# Altium PCB PCB_PCB_DCDC_BanTay_2025-10-21.pcbdoc
Units mm, origin at the board's own origin, x right, y up, seen from the top; angles counter-clockwise.
Board outline 85.05 x 64.78 mm, 2 copper layers (Top Layer, Bottom Layer); 39 components, 26 nets, 114 pads, 191 vias.
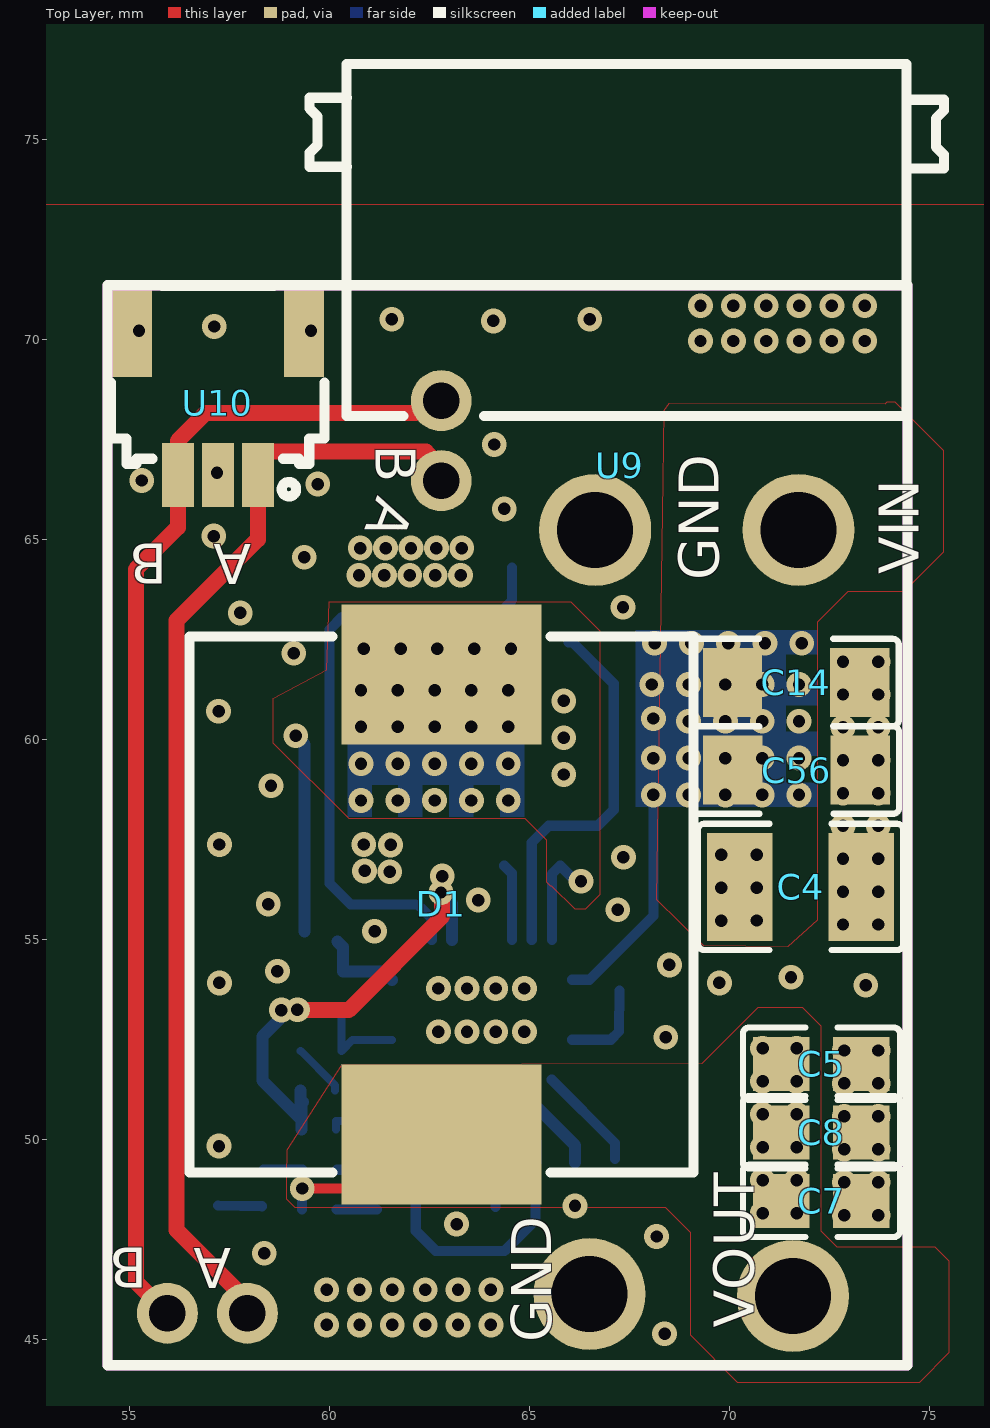
[diagram p0: Top Layer view]
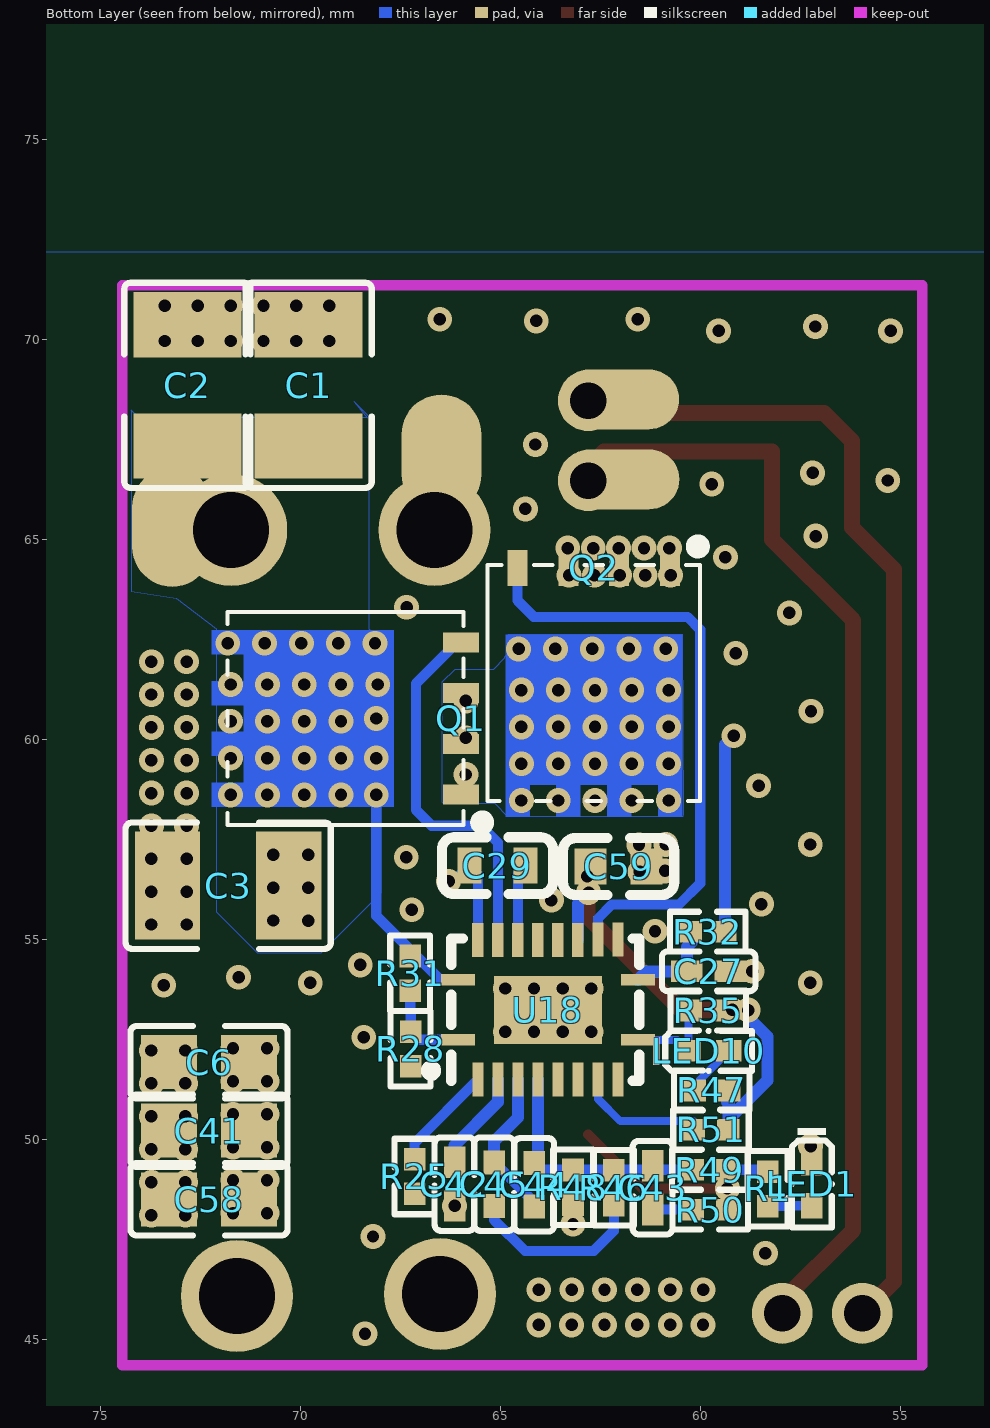
[diagram p1: Bottom Layer view, seen from below]

## Layer stack, top to bottom
Top Layer: signal copper (thickness not stored)
Dielectric: dielectric 0.32, FR-4, Dk 4.8
Bottom Layer: signal copper (thickness not stored)

## Board outline
110.45,25.4 25.4,25.4 25.4,90.18 110.45,90.18

## Components (designator, comment, footprint, x,y, rotation, side; value= is the part's Value field where it differs from the comment)
C1 "100uF" C1210#1 69.8,68.86 r90 bottom
C2 "100uF" C1210#1 72.83,68.86 r90 bottom
C3 "100uF" C1210#1 71.81,56.35 r0 bottom
C4 "100uF" C1210#2 71.79,56.32 r180 top
C5 "22uF" C0805#1 72.31,51.898 r0 top
C6 "22uF" C0805#2 72.29,51.938 r180 bottom
C7 "22uF" C0805#1 72.31,48.47 r0 top
C8 "22uF" C0805#1 72.31,50.184 r0 top
C14 "4.7uF" C1206 71.68,61.43 r180 top
C27 "12pF" C0402#1 59.8,54.21 r0 bottom
C29 "100nF" C0603#1 65.08,56.85 r180 bottom
C41 "22uF" C0805#2 72.29,50.224 r180 bottom
C42 "1uF" C0402#1 66.15,48.89 r270 bottom
C43 "470pF" C0402#1 61.2,48.8 r90 bottom
C44 "330pF" C0402#2 64.16,48.87 r270 bottom
C45 "3.9nF" C0402#2 65.16,48.89 r270 bottom
C56 "4.7uF" C1206 71.69,59.24 r180 top
C58 "22uF" C0805#2 72.29,48.51 r180 bottom
C59 "2.2uF" C0603#2 62.05,56.83 r180 bottom
D1 "4.7uH" IND-SMD_L12.6-W12.5-SRP1265A-220M 62.81,55.88 r270 top
LED1 "SZYY0402B" LED0402-RD_BLUE 57.22,48.89 r90 bottom
LED10 "TZ-P2-0402RTIA1-0.45T" LED0402-RD_RED 59.8,52.22 r0 bottom
Q1 "BSC070N10NS5(ES)" TDSON-8_L5.9-W5.2-P1.27-BL-1 67.77,60.53 r270 bottom
Q2 "BSC070N10NS5(ES)" TDSON-8_L5.9-W5.2-P1.27-BL-1 62.67,62.52 r180 bottom
R1 "12.4kΩ" R0402 58.32,48.77 r270 bottom
R25 "33kΩ" R0402 67.15,49.08 r270 bottom
R28 "12.4kΩ" R0402 67.25,52.27 r270 bottom
R31 "49.9kΩ" R0402 67.26,54.16 r270 bottom
R32 "392Ω" R0402 59.82,55.2 r0 bottom
R35 "20kΩ" R0402 59.81,53.23 r0 bottom
R46 "3.57kΩ" R0402 62.17,48.8 r90 bottom
R47 "2.2kΩ" R0402 59.72,51.23 r180 bottom
R48 "3.09kΩ" R0402 63.19,48.81 r270 bottom
R49 "24kΩ" R0402 59.77,49.25 r0 bottom
R50 "47.5Ω" R0402 59.76,48.25 r0 bottom
R51 "1kΩ" R0402 59.741,50.25 r180 bottom
U9 "XT30(2+2)PW-M.G.B" CONN-TH_4P-XT30PW-M 67.27,66.86 r180 top
U10 "HX 1.0-3P WTDK" CONN-SMD_3P-P1.00_HANXIA_HX-1.0-3P-WTDK 57.22,68.42 r180 top
U18 "LM5146RGYR" VQFN-20_L4.5-W3.5-P0.50-BL-EP 63.82,53.25 r0 bottom

## Footprints (in the part's own frame and the unit in brackets; to place one, negate y for a bottom-side part, rotate by r counter-clockwise, add the part's x,y. Pads: shape width x height; smd on the part's side, far side on the other; paste and mask are expansions set on the pad)
C0402#1 [mm]
  rect 0.79x0.54 smd paste-100 mask+0.051: 1(0.545,0) 2(-0.545,0)
  silkscreen extent -1.17,-0.5 1.17,0.5
C0402#2 [mm]
  rect 0.6x0.54 smd paste-100 mask+0.051: 1(0.545,0) 2(-0.545,0)
  silkscreen extent -1.17,-0.5 1.17,0.5
C0603#1 [mm]
  rect 0.6x0.9 smd paste+0 mask+0.051: 1(0.7,0) 2(-0.7,0)
  silkscreen extent -1.39,-0.71 1.39,0.71
C0603#2 [mm]
  rect 0.8x0.9 smd paste+0 mask+0.051: 1(0.7,0) 2(-0.7,0)
  silkscreen extent -1.39,-0.71 1.39,0.71
C0805#1 [mm]
  rect 1.41x1.35 smd paste-100 mask+0.051: 1(-1,0) 2(1,0)
  silkscreen extent -1.96,-0.9 1.96,0.9
C0805#2 [mm]
  rect 1.41x1.35 smd paste-100 mask+0.051: 1(1,0) 2(-1,0)
  silkscreen extent -1.96,-0.9 1.96,0.9
C1206 [mm]
  rect 1.485x1.728 smd paste-100 mask+0.051: 1(-1.593,0) 2(1.593,0)
  silkscreen extent -2.56,-1.09 2.56,1.09
C1210#1 [mm]
  rect 1.635x2.7 smd paste-100 mask+0.051: 1(1.517,0) 2(-1.517,0)
  silkscreen extent -2.56,-1.58 2.56,1.58
C1210#2 [mm]
  rect 1.635x2.7 smd paste-100 mask+0.051: 1(-1.517,0) 2(1.517,0)
  silkscreen extent -2.56,-1.58 2.56,1.58
CONN-SMD_3P-P1.00_HANXIA_HX-1.0-3P-WTDK [mm]
  rect 0.8x1.6 smd paste+0 mask+0.051: 1(-1,1.8) 2(0,1.8) 3(1,1.8)
  rect 1x2.3 smd paste+0 mask+0.051: 4(2.15,-1.8) 5(-2.15,-1.8)
  silkscreen extent -2.67,-2.92 2.67,2.34
CONN-TH_4P-XT30PW-M [mil]
  round 110.24 hole 74.8 paste+0 mask+1.97: 1(-175.78,63.59) 2(24.22,63.59)
  round 60 hole 36 paste+0 mask+1.97: 3(175.79,15.16) 4(175.79,-63.58)
  silkscreen extent -319,-395 305,-49
IND-SMD_L12.6-W12.5-SRP1265A-220M [mm]
  rect 3.5x5 smd paste+0 mask+0.051: 1(-5.75,0) 2(5.75,0)
  silkscreen extent -6.7,-6.3 6.7,6.3
LED0402-RD_BLUE [mm]
  rect 0.636x0.54 smd paste-100 mask+0.051: 1(0.538,0) 2(-0.538,0)
  silkscreen extent -1.09,-0.54 1.39,0.54
LED0402-RD_RED [mm]
  rect 0.636x0.54 smd paste-100 mask+0.051: 1(0.508,0) 2(-0.508,0)
  silkscreen extent -1.09,-0.54 1.39,0.54
R0402 [mm]
  rect 0.566x0.54 smd paste-100 mask+0.051: 1(0.433,0) 2(-0.433,0)
  silkscreen extent -0.94,-0.5 0.94,0.5
TDSON-8_L5.9-W5.2-P1.27-BL-1 [mm]
  rect 0.5x0.9 smd paste-100 mask+0.05: 1(1.905,1.775) 2(0.635,1.775) 3(-0.635,1.775) 4(-1.905,1.775)
  Top Layer region: 2.205,0.1 -2.205,0.1 -2.205,-4.45 -1.605,-4.45 -1.605,-3.65 -0.935,-3.65 -0.935,-4.45 -0.335,-4.45 -0.335,-3.65 0.335,-3.65 0.335,-4.45 0.935,-4.45 0.935,-3.65 1.605,-3.65 1.605,-4.45 2.205,-4.45
  silkscreen extent -2.66,-4.06 2.75,2.46
VQFN-20_L4.5-W3.5-P0.50-BL-EP [mm]
  rect 0.85x0.28 smd paste+0 mask+0.051: 1(2.25,0.752) 10(-2.25,0.752) 11(-2.25,-0.748) 20(2.25,-0.75)
  rect 0.28x0.85 smd paste+0 mask+0.051: 2(1.749,1.75) 3(1.248,1.75) 4(0.749,1.75) 5(0.248,1.75) 6(-0.251,1.75) 7(-0.752,1.75) 8(-1.251,1.75) 9(-1.752,1.75) 12(-1.752,-1.75) 13(-1.251,-1.75) 14(-0.75,-1.748) 15(-0.25,-1.748) 16(0.25,-1.748) 17(0.75,-1.748) 18(1.25,-1.748) 19(1.75,-1.748)
  rect 2.7x1.7 smd paste+0 mask+0.051: 21(0,0.002)
  silkscreen extent -2.29,-1.78 3.05,1.78

## Free pads (board coordinates)
  oval 2x3 smd far side paste-100 mask+0.051: 1(66.48,67.13) 1(73.21,65.32)
  round 2.8 hole 1.9 paste+0 mask+0.05: 1(71.595,46.09) 2(66.515,46.14)
  oval 3x1.5 smd far side paste-100 mask+0.051: 2(62.04,68.509) 4(62.03,66.509)
  round 1.524 hole 0.914 paste+0 mask+0.05: 3(57.96,45.66) 4(55.96,45.66)

## Via types
v1: diameter 0.62, hole 0.31, Top Layer to Bottom Layer, tented both sides, 191 vias

## Nets (pads, with @x,y where several pads share a name; then routed paths per layer and width w, separated by ;. In a path a pad name is that pad's centre, name@x,y a point inside that pad or via, vN(x,y) a via of type N, cw(c..) or ccw(c..) an arc to the next point about the centre after c; other vN are vias at no path point)
A: pad.3 pad.4@62.03,66.509 U9.3 U10.1 | length 27.9
  Top Layer w0.4: pad.3 57.96,45.97 56.19,47.74 56.19,62.98 58.22,65.01 U10.1 58.22,67.199 62.421,67.199 U9.3@62.805,66.815
B: pad.2@62.04,68.509 pad.4@55.96,45.66 U9.4 U10.3 | length 29.7
  Top Layer w0.4: pad.4@55.96,45.66 55.17,46.45 55.17,64.26 56.22,65.31 U10.3 56.22,67.47 56.92,68.17 62.16,68.17 U9.4@62.805,68.815
C29_1: C29.1 U18.17 | length 1.9
  Bottom Layer w0.254: C29.1 64.57,56.66 U18.17
C29_2: C29.2 D1.1 Q1.1 Q1.2 Q1.3 R32.2 U18.19 | length 7.6
  Bottom Layer w0.254: U18.19 65.57,56.64 C29.2 66.17,56.46 v1(66.3,56.46)
  Bottom Layer w0.3: v1(59.17,60.1) 59.387,59.883 R32.2
  other v1: 60.8,58.48 61.72,58.48 62.64,58.48 63.56,58.48 64.48,58.48 65.869,59.131 60.8,59.4 61.72,59.4 62.64,59.4 63.56,59.4 64.48,59.4 65.869,60.05 60.8,60.32 61.72,60.32 62.64,60.32 63.56,60.32 64.48,60.32 65.869,60.97 60.8,61.24 61.72,61.24 62.64,61.24 63.56,61.24 64.48,61.24 60.87,62.27 61.79,62.27 62.71,62.27 63.63,62.27 64.55,62.27
C42_2: C42.2 U18.3 | length 2.5
  Bottom Layer w0.3: U18.3@65.07,51.5 65.07,50.941 66.149,49.859 C42.2@66.149,49.435
C43_1: C43.1 C44.2 R46.1 R48.2 R49.1 U18.5 | length 6.2
  Bottom Layer w0.254: R49.1 63.995,49.25 C44.2
  Bottom Layer w0.3: U18.5@64.069,51.5 64.069,49.414 C44.2@64.16,49.414
C43_2: C43.2 R50.1 | length 1
  Bottom Layer w0.254: R50.1 C43.2@61.201,48.256
C45_1: C45.1 R46.2 | length 4.5
  Bottom Layer w0.254: R46.2 62.169,47.72 62.669,47.22 64.389,47.22 65.161,47.989 C45.1
C45_2: C44.1 C45.2 U18.4 | length 3.8
  Bottom Layer w0.254: C44.1 64.16,48.435 C45.2
  Bottom Layer w0.3: U18.4@64.569,51.5 64.569,50.552 65.161,49.96 C45.2@65.161,49.435
C59_2: C59.2 R35.2 R47.1 R51.1 U18.14 | length 13.4
  Top Layer w0.4: v1@58.811,53.24 60.49,53.24 62.829,55.579 62.829,56.59 62.8,56.56 v1(62.8,56.18)
  Bottom Layer w0.3: R47.1 59.286,50.58 59.23,50.58 58.331,51.479 58.331,52.581 58.81,53.06 58.81,53.24 59.367,53.24 R35.2@59.377,53.229 ; R51.1 59.308,50.902 59.346,50.94 ; C59.2@62.83,56.59 62.83,56.21 v1(62.8,56.18) 63.07,55.91 U18.14
  other v1: 58.81,53.24 59.21,53.25 62.83,56.59
GND: C1.1 C2.1 C3.1 C4.1 C5.2 C6.2 C7.2 C8.2 C14.1 C27.2 C41.2 C42.1 C56.1 C58.2 C59.1 LED1.1 pad.1@66.48,67.13 pad.2@66.515,46.14 Q2.1 Q2.2 Q2.3 R25.1 R28.1 R48.1 U9.2 U10.2 U10.4 U10.5 U18.6 U18.12 U18.15 U18.21
  other v1: 68.39,45.15 59.94,45.37 60.761,45.37 61.582,45.37 62.403,45.37 63.225,45.37 64.046,45.37 59.939,46.25 60.761,46.25 61.582,46.25 62.403,46.25 63.224,46.25 64.046,46.25 58.38,47.16 68.19,47.58 63.19,47.89 72.88,48.11 73.73,48.11 66.15,48.345 72.88,48.934 73.73,48.934 72.88,49.758 73.73,49.758 57.25,49.84 72.88,50.582 73.73,50.582 72.88,51.406 73.73,51.406 72.88,52.23 73.73,52.23 68.42,52.56 62.733,52.7 63.45,52.7 64.166,52.7 64.883,52.7 62.733,53.78 63.45,53.78 64.167,53.78 64.883,53.78 73.42,53.86 57.26,53.92 69.76,53.92 71.55,54.06 58.71,54.21 68.51,54.37 61.14,55.21 72.85,55.38 73.73,55.381 67.22,55.75 58.48,55.89 63.73,55.99 72.85,56.201 73.73,56.202 61.52,56.7 60.89,56.72 72.85,57.023 73.73,57.023 67.36,57.06 57.26,57.38 60.87,57.38 61.54,57.37 72.85,57.844 73.73,57.844 72.85,58.665 73.73,58.666 58.55,58.85 72.85,59.486 73.73,59.487 72.85,60.308 73.73,60.308 57.24,60.71 72.85,61.129 73.73,61.129 72.85,61.95 73.73,61.95 59.12,62.16 57.78,63.17 67.35,63.31 60.75,64.11 61.385,64.11 62.02,64.11 62.655,64.11 63.29,64.11 59.38,64.56 60.78,64.79 61.415,64.79 62.05,64.79 62.685,64.79 63.32,64.79 57.12,65.09 64.38,65.77 59.72,66.39 55.32,66.48 57.2,66.67 64.13,67.38 69.287,69.967 70.108,69.967 70.929,69.967 71.75,69.967 72.572,69.967 73.393,69.967 55.25,70.22 59.55,70.22 57.13,70.33 64.11,70.47 61.57,70.51 66.52,70.51 69.286,70.847 70.108,70.847 70.929,70.847 71.75,70.847 72.571,70.847 73.393,70.847
LED1_2: LED1.2 R1.1 | length 1.1
  Bottom Layer w0.254: LED1.2 R1.1
LED10_1: LED10.1 R35.1 U18.10 | length 2.4
  Bottom Layer w0.2: R35.1 60.308,53.165 LED10.1 60.586,52.498 U18.10
LED10_2: LED10.2 R47.2 | length 1.3
  Bottom Layer w0.2: LED10.2 60.152,51.36 R47.2
Q1_4: Q1.4 U18.18 | length 9.5
  Bottom Layer w0.254: U18.18@65.07,54.997 65.07,57.431 65.491,57.85 66.721,57.85 67.119,58.248 67.119,61.401 66.086,62.434 Q1.4@65.994,62.434
Q2_4: Q2.4 U18.13 | length 15.5
  Bottom Layer w0.254: U18.13@62.568,55 62.568,55.531 62.22,55.881 60.541,55.881 60.01,56.409 60.01,62.749 60.33,63.069 64.17,63.069 64.574,63.476 Q2.4
S$3883: 
U18_1: R28.2 R31.1 U18.1 | length 2.3
  Bottom Layer w0.254: U18.1 67.045,52.498 R28.2 ; R28.2 R31.1
U18_2: R25.2 U18.2 | length 2.6
  Bottom Layer w0.254: U18.2 67.15,49.918 R25.2
U18_7: U18.7
U18_8: R51.2 U18.8 | length 3.3
  Bottom Layer w0.2: R51.2@60.175,50.25 60.175,50.461 62.009,50.461 62.568,51.02 U18.8@62.568,51.5
U18_9: U18.9
U18_11: C27.1 R32.1 U18.11 | length 2.1
  Bottom Layer w0.3: R32.1@60.213,54.95 60.345,54.818 C27.1 61.358,54.21 U18.11
U18_16: U18.16
VIN: C1.2 C2.2 C3.2 C4.2 C14.2 C56.2 pad.1@73.21,65.32 R31.2 U9.1 U18.20 | length 9.1
  Bottom Layer w0.254: U18.20@66.07,53.999 66.51,53.999 68.11,55.599 68.11,60.529 69.545,60.529
  other v1: 69.81,55.478 70.689,55.478 69.81,56.299 70.689,56.299 69.81,57.12 70.69,57.121 68.109,58.62 68.99,58.62 69.91,58.62 70.83,58.62 71.75,58.62 68.109,59.54 68.99,59.54 69.91,59.54 70.83,59.54 71.75,59.54 68.99,60.46 69.91,60.46 70.83,60.46 71.75,60.46 68.11,60.53 68.07,61.38 68.99,61.38 69.91,61.38 70.83,61.38 71.75,61.38 68.14,62.41 69.06,62.41 69.98,62.41 70.9,62.41 71.82,62.41
VOUT: C5.1 C6.1 C7.1 C8.1 C41.1 C58.1 D1.2 pad.1@71.595,46.09 R1.2 R49.2 R50.2 | length 6.1
  Top Layer w0.254: v1(59.332,48.779) 61.459,48.779 D1.2
  Bottom Layer w0.254: R1.2 58.367,49.25 R49.2 ; R50.2 v1(59.332,48.779) R49.2@59.337,49.249
  other v1: 70.84,48.164 71.69,48.164 70.84,48.988 71.69,48.988 70.84,49.812 71.69,49.812 70.84,50.636 71.69,50.636 70.84,51.46 71.69,51.46 70.84,52.284 71.69,52.284
copper on no net: | length 0

## Polygon pours and split planes (outlines as drawn)
GND on Mid-Layer 1 (solid): 44.91,73.76 45.1,73.95 90.26,73.95 87.34,71.03 87.34,38.1 86.96,38.48 47.45,38.48
VIN on Bottom Layer (solid): 68.34,68.05 74.04,68.05 74.23,68.24 74.23,63.71 73.11,63.53 72.11,62.77 72.11,55.7 71.08,54.67 69.49,54.67 67.99,56.17 67.99,62.47 68.28,62.76 68.28,68.07 68.66,68.45
C29_2 on Bottom Layer (solid): 60.45,62.62 64.81,62.62 64.83,62.6 64.83,62.14 64.91,62.06 64.91,62.03 65.19,61.75 66.15,61.75 66.47,61.43 66.47,58.45 66.43,58.41 65.15,58.41 64.83,58.09 60.44,58.09 60.42,58.11
GND on Bottom Layer (solid): 45.26,72.66 45.73,72.19 83.69,72.19 93.45,62.43 93.45,41.78 92.64,40.97 41.38,40.97
GND on Mid-Layer 2 (solid): 42.53,77.48 43.94,76.07 92.57,76.07 97.75,70.89 97.75,39.19 97.66,39.28 38.1,39.28 38.2,39.38 38.2,39.66
C29_2 on Top Layer (solid): 66.15,55.76 65.57,56.34 65.54,56.34 65.44,56.44 65.44,57.49 64.91,58.02 60.5,58.02 58.61,59.91 58.61,61.03 59.94,61.75 60.001,63.45 66.04,63.45 66.77,62.72 66.77,56.12 66.41,55.76 66.15,55.76
VIN on Top Layer (solid): 68.5,68.41 73.91,68.4 73.96,68.45 74.14,68.45 75.36,67.23 75.36,64.69 74.37,63.7 72.97,63.7 72.21,62.94 72.21,55.48 71.47,54.82 69.37,54.85 68.19,56 68.36,66.49 68.38,68.24
VOUT on Top Layer (solid): 60.32,51.87 58.94,49.74 58.93,49.07 58.93,48.52 59.14,48.31 68.4,48.31 69.03,47.68 69.03,45.12 70.21,43.94 74.77,43.94 75.51,44.68 75.51,46.96 75.16,47.31 72.7,47.31 72.3,47.71 72.3,52.84 71.84,53.3 70.72,53.3 69.32,51.9
GND on Top Layer (solid): 50.47,74.06 51.14,73.39 86.3,73.39 86.7,72.99 86.7,40.24 85.36,41.51 46.06,41.51 46,41.57 45.99,41.57

## Silkscreen, mask and mechanical layers (free items; w line width, h text height)
Top Overlay:
  lines w0.254: 54.46,44.36 74.46,44.36 74.46,71.36 54.46,71.36 54.46,44.36
  text "B" at 61.17,67.37 h1 r270
  text "A" at 61.223,66.129 h1 r249
  text "B" at 55.95,64.9 h1 r180
  text "A" at 58.05,64.88 h1 r180
  text "VIN" at 74.74,64.14 h1 r90
  text "GND" at 69.74,63.99 h1 r90
  text "B" at 55.46,47.3 h1 r180
  text "A" at 57.56,47.28 h1 r180
  text "VOUT" at 70.62,45.3 h1 r90
  text "GND" at 65.56,44.94 h1 r90